# EAGLE board roomba_wall_v2_c (EAGLE 7.6.0)
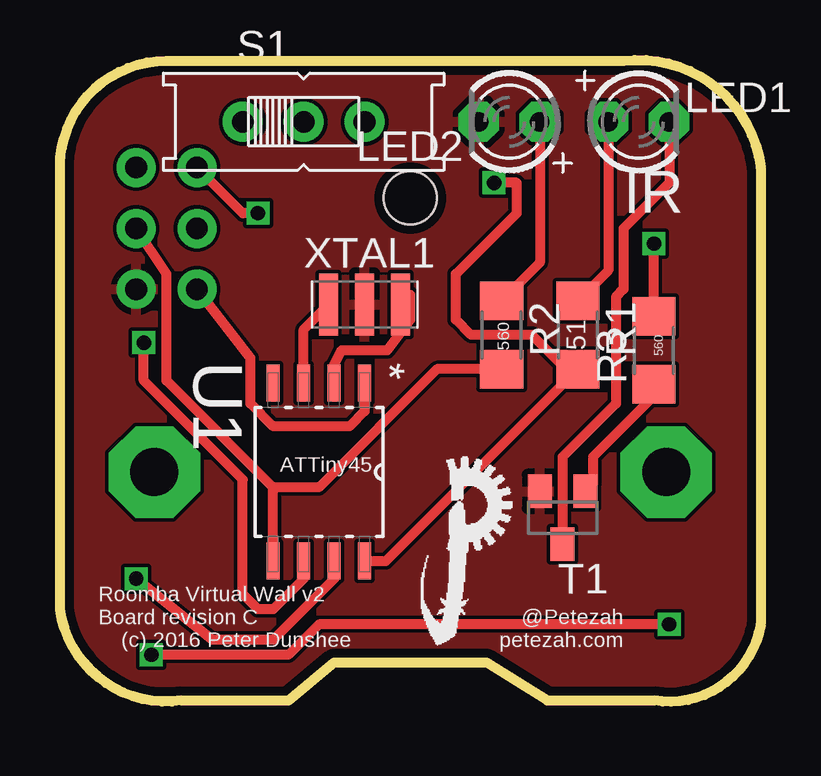
[diagram p0: board, top side]
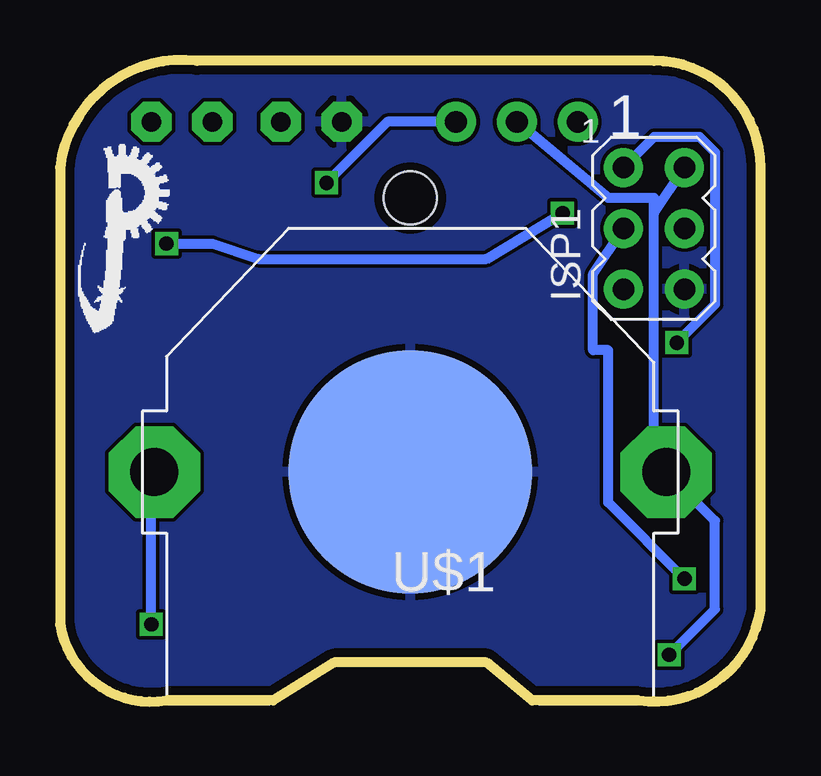
[diagram p1: board, bottom side, seen from below]

Size 29.21 x 26.76 mm. Coordinates in mm from the lower left corner, seen from the top.
Outline: 5.08,0.05 9.53,0.05 11.43,1.64 17.78,1.64 20.32,0.05 24.77,0.05 arc90 29.21,3.23 29.21,22.28 arc90 23.5,26.72 4.45,26.72 arc90 0,22.28 0,3.86 arc90 5.08,0.05
Copper layers (1*16): Top 0.0356mm / dielectric 1.5011mm / Bottom 0.0356mm
Design rules "LaenPCBOrder": minimum track width 6mil, minimum drill 13mil, track to track 6mil, track to pad 6mil, pad to pad 6mil, via to via 6mil, smd to smd 6mil, copper to edge 15mil, drill to drill 6mil, minimum pad ring 7mil, minimum via ring 7mil, stop-mask expansion 3mil, vias tented up to drill 0mil, thermal gap 10mil
Holes 2.2 mm at 14.61,21.01

## Footprints (pad centres in the part's own frame; a part is rotated, then mirrored left to right if it is on the bottom)
AVRISP = drill 0.9 pad 1.626: 1 -1.27,2.54; 2 1.27,2.54; 3 -1.27,0; 4 1.27,0; 5 -1.27,-2.54; 6 1.27,-2.54
LED3MM = drill 0.813 pad 1.676 octagon: A -1.27,0; K 1.27,0
R1206 = smd 1.6 x 1.803: 1 -1.422,0; 2 1.422,0
EG1218 = drill 0.9 pad 1.676: O -2.54,0; P 0,0; S 2.54,0
SOT23 = smd 1 x 1.4: 1 -0.95,-1.1; 2 0.95,-1.1; 3 0,1.1
SOIC127P798X216-8N = smd 1.549 x 0.533: 1 -3.708,1.905; 2 -3.708,0.635; 3 -3.708,-0.635; 4 -3.708,-1.905; 5 3.708,-1.905; 6 3.708,-0.635; 7 3.708,0.635; 8 3.708,1.905
CR2032-THRU = drill 2 pad 3.81 octagon: +1 -10.668,0; +2 10.668,0 | smd 10.16 x 10.16: - 0,0
CSTCR6M = smd 0.8 x 2.6: 1 -1.5,0; 2 0,0; 3 1.5,0

## Placement (x,y rotation side)
ISP1  AVRISP-6  [AVRISP]  4.45,19.74 0 bottom
LED1  IR  [LED3MM]  24.13,24.18 0 top
LED2  [LED3MM]  18.73,24.18 180 top
R1  51  [R1206]  21.59,15.29 270 top
R2  560  [R1206]  18.41,15.29 270 top
R3  560  [R1206]  24.77,14.66 90 top
S1  [EG1218]  10.16,24.18 0 top
T1  BC846  [SOT23]  20.95,7.67 180 top
U1  ATTINY45V-10SU  [SOIC127P798X216-8N]  10.79,9.58 270 top
U$1  [CR2032-THRU]  14.61,9.58 180 bottom
U$2  [LOGO_TINY]  14.92,2.27 0 top
U$3  [LOGO_TINY]  28.57,15.29 0 bottom
XTAL1  8MHZ  [CSTCR6M]  12.7,16.56 0 top

## Library data of the parts
ISP1 LED1 LED2 R1-R3 S1 U$1 = adafruit
T1 = transistor
U1 = ATTINY45V-10SU
U$2 U$3 = petezah
XTAL1 = murata-filter; MPN: CSTCR6M00G53-R0; OC_FARNELL: 1170434; OC_NEWARK: 25M8759

## Nets
+3V3: ISP1.2 S1.P U$1.+1 U$1.+2
GND: ISP1.6 LED2.K T1.2 U$1.- XTAL1.2
MISO: ISP1.1 R3.2 U1.6
MOSI: ISP1.4 R2.2 U1.5
N$1: U1.3 XTAL1.1
N$2: U1.2 XTAL1.3
N$3: LED1.A R1.1
N$4: LED1.K T1.3
N$5: R3.1 T1.1
N$6: LED2.A R2.1
RST: ISP1.5 U1.1
SCK: ISP1.3 U1.7
VCC: R1.2 S1.S U1.8

## Tracks (layer width: path | path; a pad name or v marks a point on that pad's centre or on a via)
+3V3  (via drill 0.6)
  Top 0.406: U$1.+2 25.4,9.58 | v25.4,3.23 10.79,3.23 9.53,1.96 v3.81,1.96
  Bottom 0.406: 4.45,20.37 4.45,9.58 U$1.+1 1.91,7.54 1.91,3.86 v3.81,1.96 | 4.45,20.37 ISP1.2 | 4.45,20.37 4.45,21.01 6.35,21.01 S1.P | v25.4,3.23 25.4,9.45 U$1.+2
GND
  pour Bottom: 0,26.72 29.21,26.72 29.21,0.05 20.32,0.05 17.78,1.64 11.43,1.64 9.53,0.05 0,0.05
  pour Top: 0,26.72 29.21,26.72 29.21,0.05 20.32,0.05 17.78,1.64 11.43,1.64 9.53,0.05 0,0.05
MISO  (via drill 0.6)
  Top 0.406: 10.16,6.4 U1.6 10.16,5.13 8.89,3.86 8.26,3.86 7.62,4.5 7.62,9.26 3.49,13.39 v3.49,14.97 | R3.2 v24.77,19.1 | v8.26,20.37 7.62,20.37 ISP1.1
  Bottom 0.406: v24.77,19.1 22.86,19.1 20.95,18.47 11.43,18.47 v8.26,20.37 | ISP1.1 4.45,23.55 2.54,23.55 1.91,22.91 1.91,16.56 v3.49,14.97
MOSI
  Top 0.406: U1.5 8.89,8.94 | 8.89,8.94 4.45,13.39 4.45,17.83 ISP1.4 | R2.2 15.72,13.87 10.79,8.94 8.89,8.94
N$1
  Top 0.406: U1.3 10.16,15.52 XTAL1.1
N$2
  Top 0.406: U1.2 11.43,14.02 11.75,14.66 13.65,14.66 14.61,15.93 14.61,16.97 XTAL1.3
N$3
  Top 0.406: LED1.A 22.86,17.98 R1.1
N$4
  Top 0.406: LED1.K 25.4,21.64 23.5,19.74 23.5,17.2 23.18,16.88 23.18,12.43 20.95,10.21 T1.3
N$5
  Top 0.406: R3.1 24.77,12.75 22.22,10.21 22.22,9.09 T1.1
N$6
  Top 0.406: LED2.A 20,18.3 R2.1
RST
  Top 0.406: U1.1 12.7,12.12 12.06,11.48 8.89,11.48 7.94,12.43 7.94,14.34 ISP1.5
SCK  (via drill 0.6)
  Top 0.406: U1.7 11.43,5.13 8.89,2.59 6.35,2.59 v3.17,5.13
  Bottom 0.406: v3.17,5.13 6.35,8.31 6.35,14.66 6.98,14.66 6.98,17.83 ISP1.3
VCC  (via drill 0.6)
  Top 0.406: U1.8 13.59,5.87 R1.2 21.59,14.02 20.95,14.02 19.68,15.29 17.14,15.29 16.51,15.93 16.51,17.83 19.05,20.37 19.05,21.64 18.41,21.64 v18.1,21.64
  Bottom 0.406: S1.S 15.56,24.18 v18.1,21.64

## Text on the board
tPlace: IR | 560 | 51 | 560 | ATTiny45 | @Petezah / petezah.com | Roomba Virtual Wall v2 / Board revision C | (c) 2016 Peter Dunshee
bPlace: 1